# Altium PCB PCB1.pcbdoc
Units mil, origin at the board's own origin, x right, y up, seen from the top; angles counter-clockwise.
Board outline 2079.8 x 2079.8 mil, 2 copper layers (Top Layer, Bottom Layer); 9 components, 14 nets, 54 pads, 51 vias.
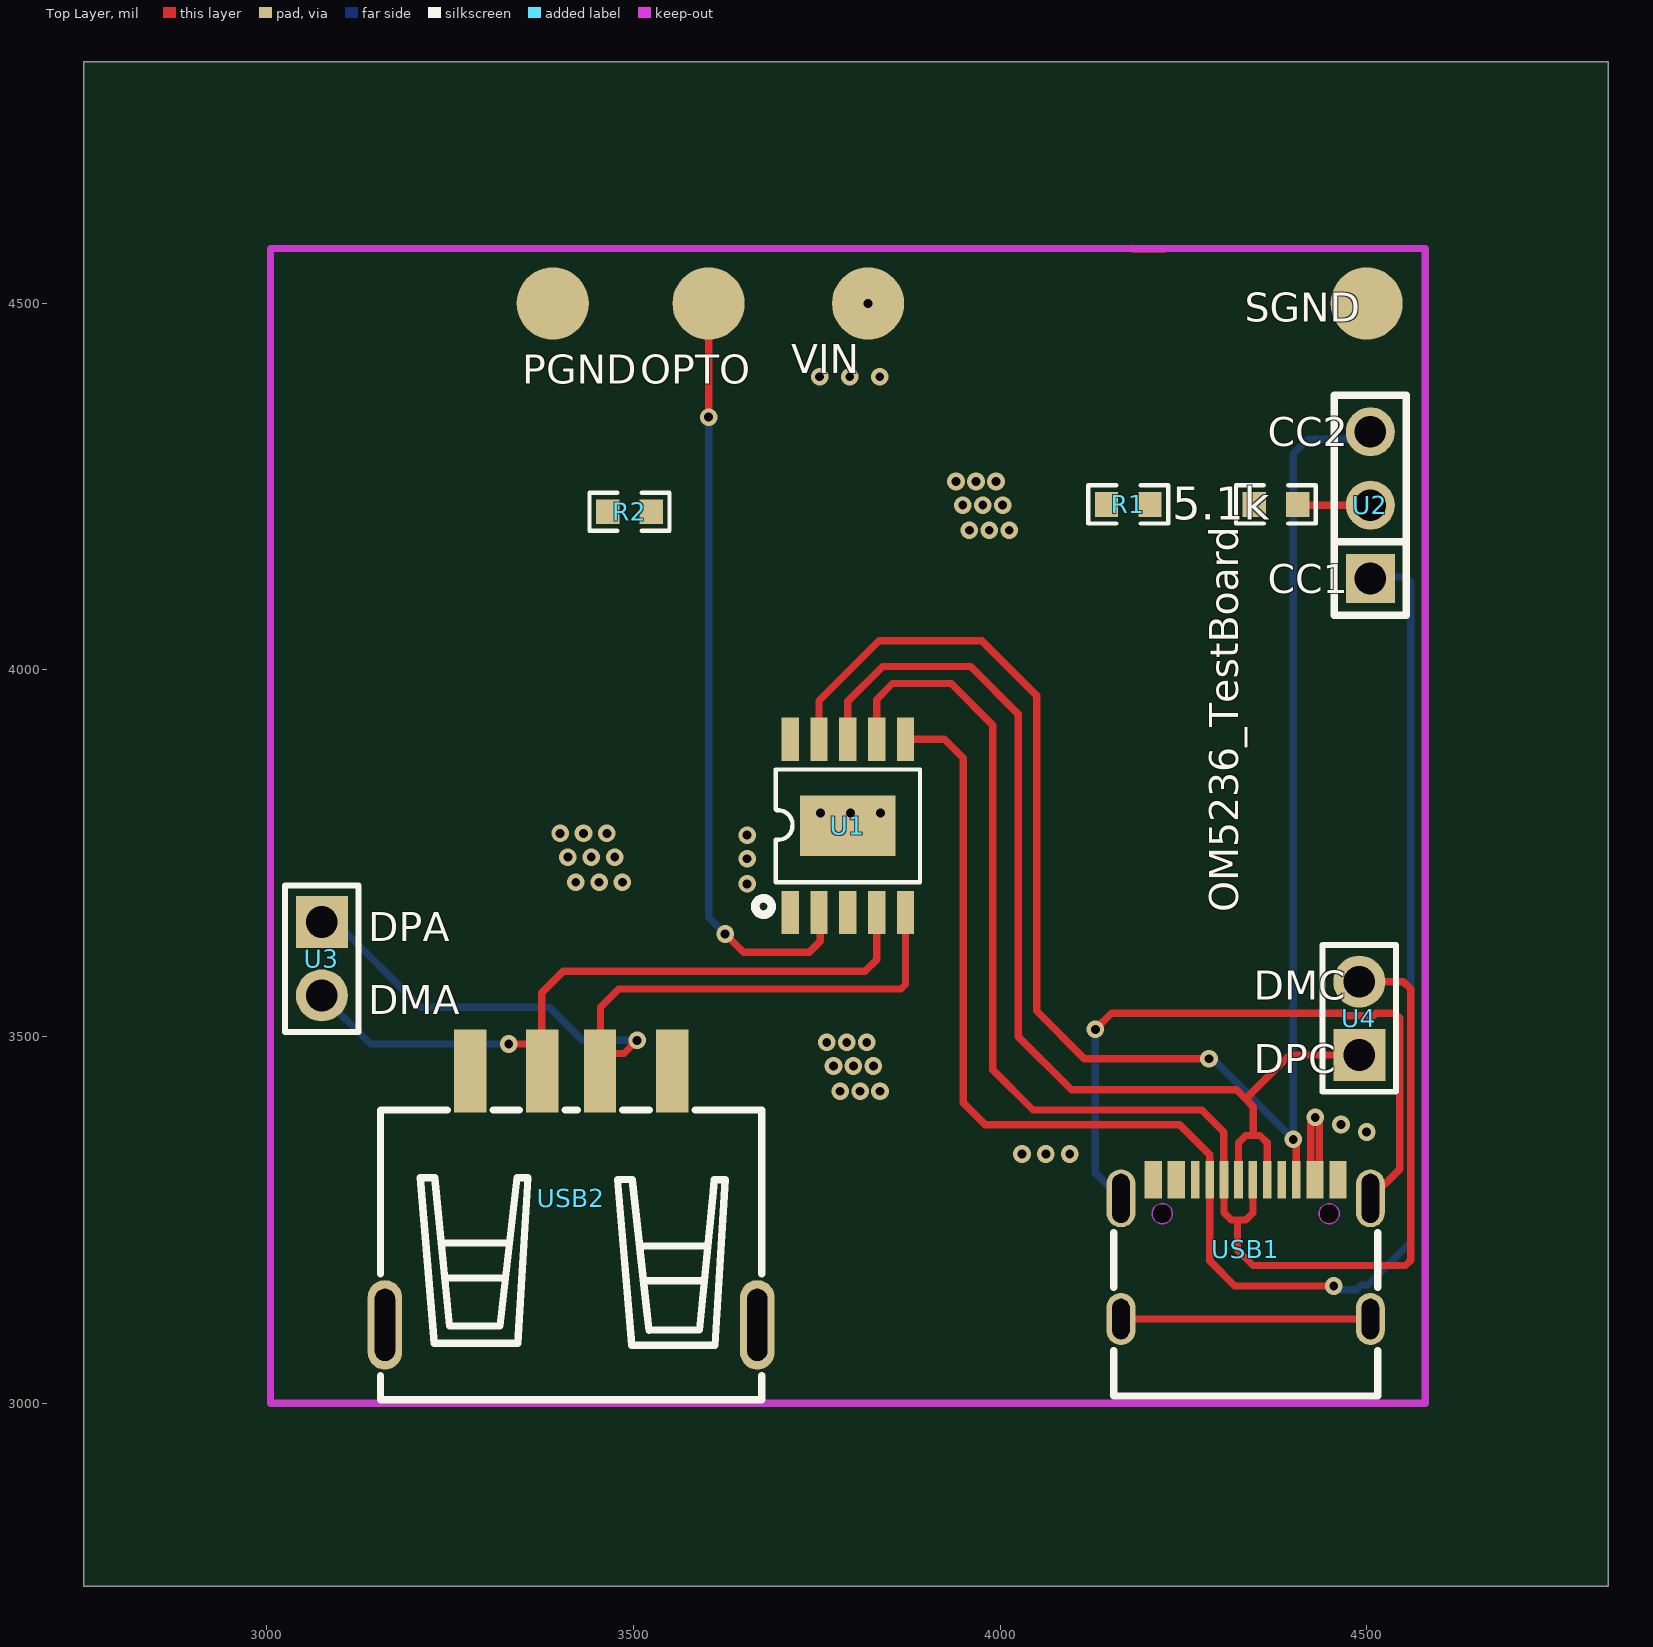
[diagram p0: Top Layer view]
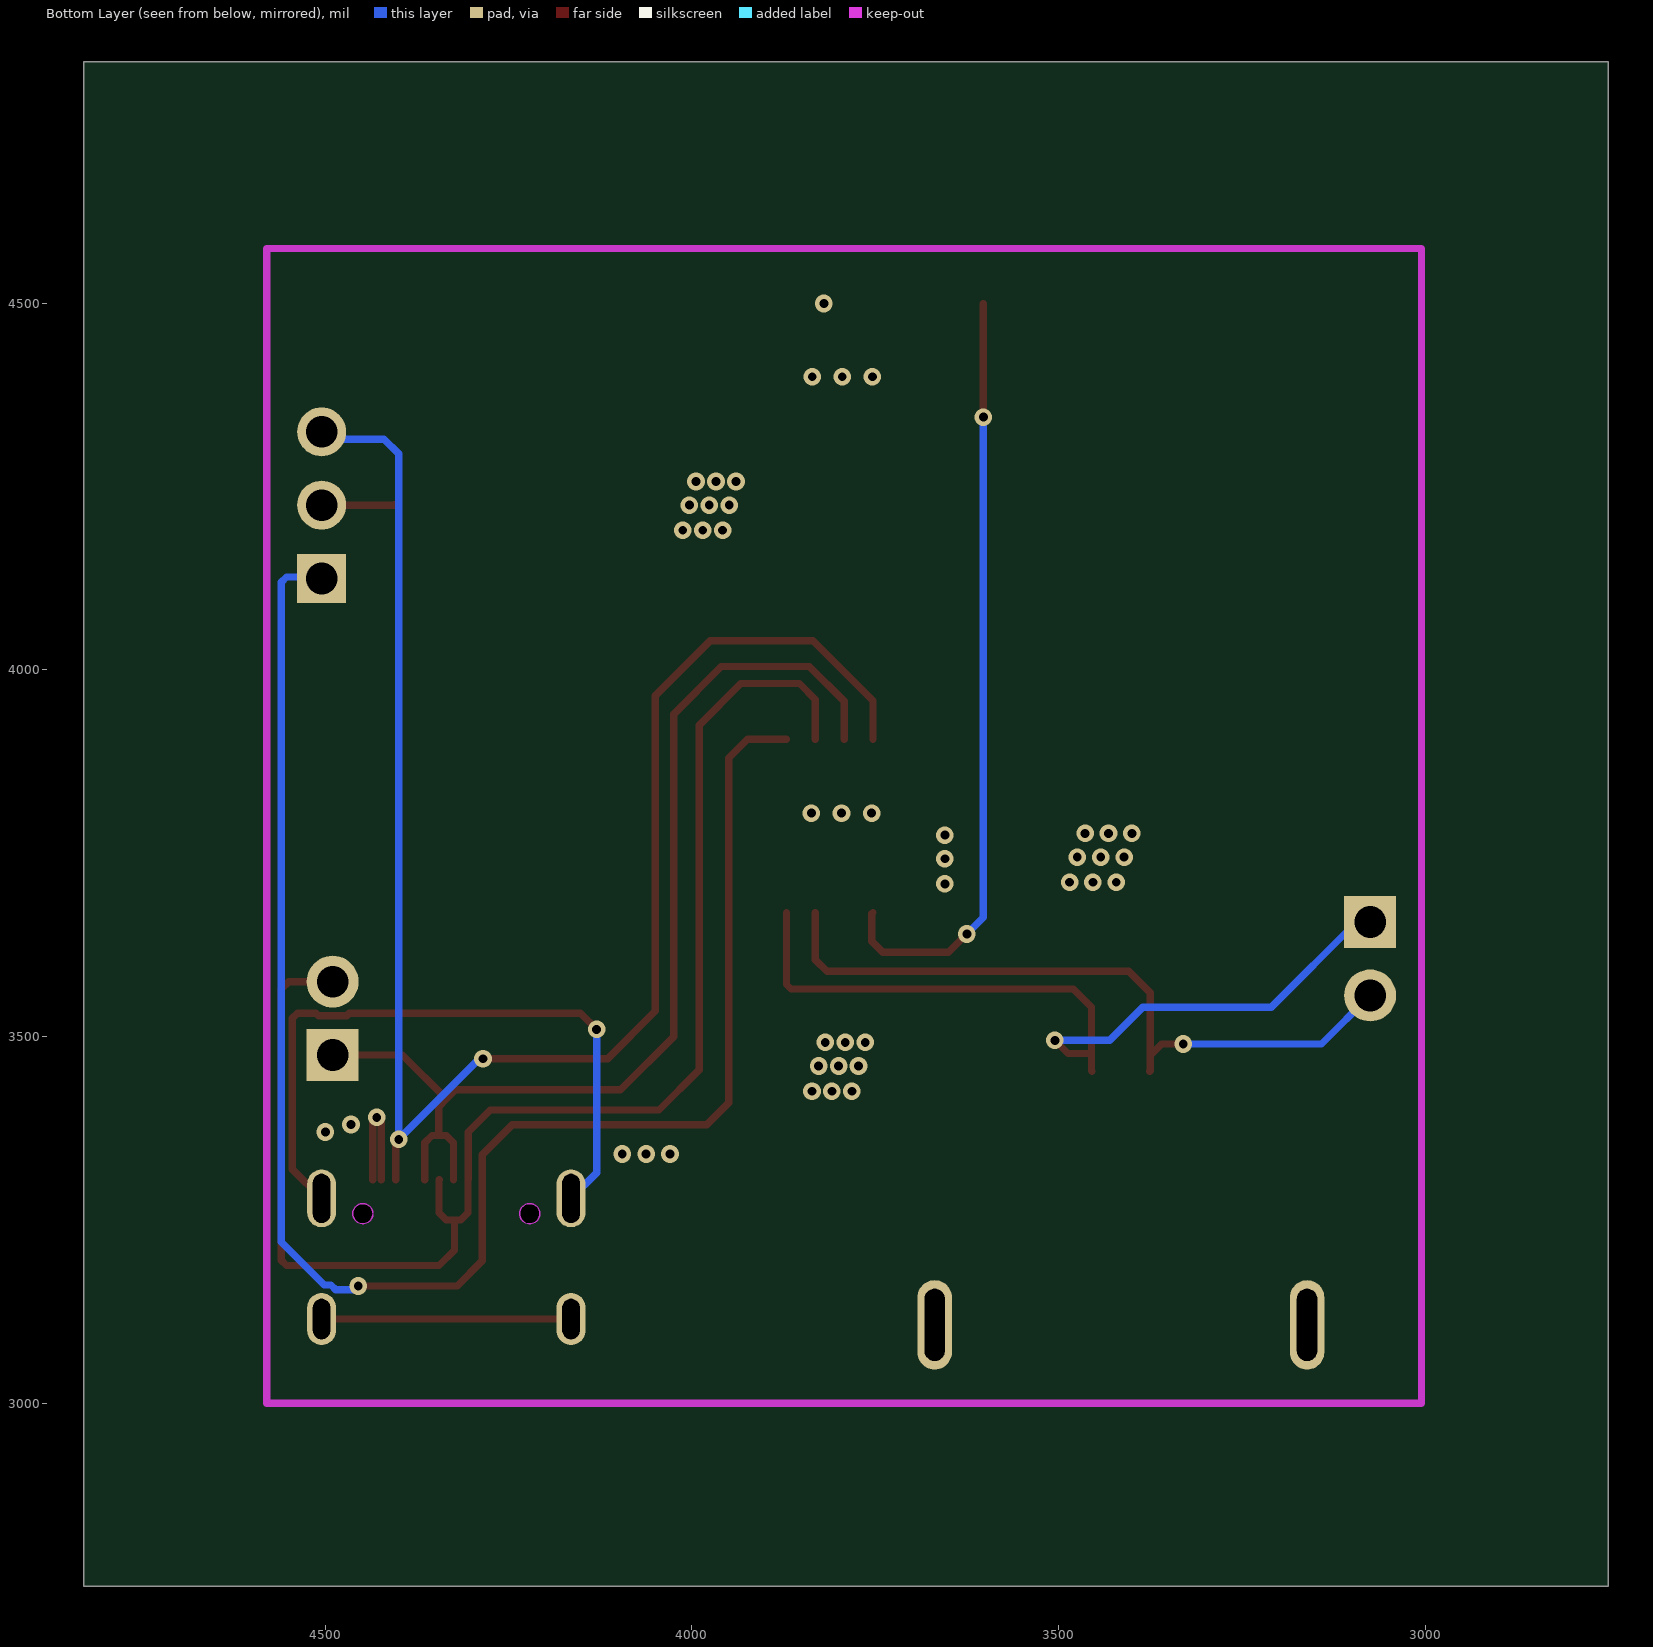
[diagram p1: Bottom Layer view, seen from below]

## Layer stack, top to bottom
Top Layer: signal copper (thickness not stored)
Dielectric: dielectric 12.6, FR-4, Dk 4.8
Bottom Layer: signal copper (thickness not stored)

## Board outline
4829.8,2750 2750,2750 2750,4829.8 4829.8,4829.8

## Design rules (kind name [scope] priority, off if disabled: settings)
BoardOutlineClearance copperThickness1oz [All] p0: genericclearance=10 ignorepadtopadclearanceinfootprint=FALSE except(0: Arc-SplitContinuation Track-SplitContinuation SMDPad-SplitContinuation THPad-SplitContinuation Via-SplitContinuation Fill-SplitContinuation Poly-SplitContinuation Region-SplitContinuation Text-SplitContinuation; 6: Track-CutoutEdge SMDPad-CutoutEdge THPad-CutoutEdge Via-CutoutEdge Region-CutoutEdge; 11.8: Track-OutlineEdge SMDPad-OutlineEdge THPad-OutlineEdge Via-OutlineEdge Fill-OutlineEdge Region-OutlineEdge Poly-OutlineEdge Text-OutlineEdge Fill-CutoutEdge)
BoardOutlineClearance copperThickness2oz [All] p0: genericclearance=10 ignorepadtopadclearanceinfootprint=FALSE except(0: Arc-SplitContinuation Track-SplitContinuation SMDPad-SplitContinuation THPad-SplitContinuation Via-SplitContinuation Fill-SplitContinuation Poly-SplitContinuation Region-SplitContinuation Text-SplitContinuation; 6: Track-CutoutEdge SMDPad-CutoutEdge THPad-CutoutEdge Via-CutoutEdge Region-CutoutEdge; 11.8: Track-OutlineEdge SMDPad-OutlineEdge THPad-OutlineEdge Via-OutlineEdge Fill-OutlineEdge Region-OutlineEdge Poly-OutlineEdge Text-OutlineEdge Fill-CutoutEdge)
Clearance copperThickness1oz [(InNet('GND') OR InNet('PGND') OR InNet('VBUSC') OR InNet('OPTP') OR InNet('DMA') OR InNet('DPA') OR InNet('CC1') OR InNet('DMC') OR InNet('DPC') OR InNet('CC2') OR InNet('VBUSA') OR InNet('VIN') OR InNet('SGND') OR InNet('$1N1508'))] p1: gap=7 ignorepadtopadclearanceinfootprint=FALSE except(4: Track-Track; 6: Track-SMDPad SMDPad-SMDPad Track-THPad SMDPad-THPad THPad-THPad Track-Via SMDPad-Via THPad-Via Via-Via SMDPad-Fill THPad-Fill Via-Fill Fill-Fill Track-Region SMDPad-Region THPad-Region Via-Region Region-Region Track-Poly SMDPad-Poly THPad-Poly Via-Poly Fill-Poly Region-Poly Poly-Poly Track-Text SMDPad-Text THPad-Text Via-Text Fill-Text Region-Text Poly-Text Text-Text; 6.9: Track-Hole SMDPad-Hole THPad-Hole Via-Hole Fill-Hole Region-Hole Poly-Hole Text-Hole Sheet-Hole; 11.8: Track-Fill Fill-Region Track-Sheet SMDPad-Sheet THPad-Sheet Via-Sheet Fill-Sheet Region-Sheet Poly-Sheet Text-Sheet)
Clearance copperThickness2oz [All] p1: gap=7 ignorepadtopadclearanceinfootprint=FALSE except(6: Track-SMDPad SMDPad-SMDPad Track-THPad SMDPad-THPad THPad-THPad Track-Via SMDPad-Via THPad-Via Via-Via SMDPad-Fill THPad-Fill Via-Fill Fill-Fill Track-Region SMDPad-Region THPad-Region Via-Region Region-Region Track-Poly SMDPad-Poly THPad-Poly Via-Poly Fill-Poly Region-Poly Poly-Poly Track-Text SMDPad-Text THPad-Text Via-Text Fill-Text Region-Text Poly-Text Text-Text; 6.9: Track-Hole SMDPad-Hole THPad-Hole Via-Hole Fill-Hole Region-Hole Poly-Hole Text-Hole Sheet-Hole; 8: Track-Track; 11.8: Track-Fill Fill-Region Track-Sheet SMDPad-Sheet THPad-Sheet Via-Sheet Fill-Sheet Region-Sheet Poly-Sheet Text-Sheet)
DiffPairsRouting differentialPair [All] p1: maxuncoupledlength=10 minlimit=6 maxlimit=6 mostfreqgap=6 toplayer_minwidth=5 toplayer_prefwidth=10 toplayer_maxwidth=100 bottomlayer_minwidth=5 bottomlayer_prefwidth=10 bottomlayer_maxwidth=100
PasteMaskExpansion pasteMaskExpansion [All] p1: expansion=0
PlaneConnect innerPlane [All] p1: planeconnectstyle=Relief reliefexpansion=20 reliefentries=4 reliefconductorwidth=10 reliefairgap=10
PolygonConnect copperRegion [All] p1: connectstyle=Direct reliefentries=4 reliefconductorwidth=10 polygonreliefangle="90 Angle" airgapwidth=10
RoutingVias viaSize [All] p1: viastyle="Through Hole" holewidth=12.0078 minholewidth=11.811 maxholewidth=248.0314 width=24.0158 minwidth=19.685 maxwidth=393.7008
SolderMaskExpansion solderMaskExpansion [All] p1: useseparateexpansions=TRUE expansion=2 expansionbottom=2
Width copperThickness1oz [All] p1: maxlimit=100 minlimit=5 preferedwidth=10
Width copperThickness2oz [All] p1: maxlimit=100 minlimit=8 preferedwidth=10

## Components (designator, comment, footprint, x,y, rotation, side; value= is the part's Value field where it differs from the comment)
5.1k "0" R0603 4376.32,4225.74 r180 top
R1 "0" R0603 4175,4225.74 r0 top
R2 "0" R0603 3494.66,4215.74 r0 top
U1 "OM5236" ESSOP-10_L4.9-W3.9-P1.00-LS6.0-BL-EP 3792.4,3787.41 r0 top
U2 "HC-PZ254-11.5L-1x3PZ" HDR-TH_3P-P2.54-V-M 4505,4224.8 r90 top
U3 "PZ2.54-1*2" HDR-TH_2P-P2.54-V-M-3 3075,3606.17 r270 top
U4 "PZ2.54-1*2" HDR-TH_2P-P2.54-V-M-3 4490,3524.8 r90 top
USB1 "KH-TYPE-C-16P" USB-C-SMD_KH-TYPE-C-16P 4335,3209.8 r0 top
USB2 "10.0 QHHTZB6.3" USB-A-TH_10.0QHHTZB6.3 3415,3279.8 r0 top

## Footprints (in the part's own frame and the unit in brackets; to place one, negate y for a bottom-side part, rotate by r counter-clockwise, add the part's x,y. Pads: shape width x height; smd on the part's side, far side on the other; paste and mask are expansions set on the pad)
ESSOP-10_L4.9-W3.9-P1.00-LS6.0-BL-EP [mm]
  rect 0.6x1.5 smd: 1(-2,-3) 2(-1,-3) 3(0,-3) 4(1,-3) 5(2,-3) 6(2,3) 7(1,3) 8(0,3) 9(-1,3) 10(-2,3)
  rect 3.3x2.1 smd: 11(0,0)
  silkscreen extent -3.2,-3.08 2.5,1.95
HDR-TH_2P-P2.54-V-M-3 [mm]
  rect 1.8x1.8 hole 1.1: 1(-1.27,0)
  round 1.8 hole 1.1: 2(1.27,0)
  silkscreen extent -2.54,-1.27 2.54,1.27
HDR-TH_3P-P2.54-V-M [mm]
  rect 1.7x1.7 hole 1.1: 1(-2.54,0)
  round 1.7 hole 1.1: 2(0,0) 3(2.54,0)
  silkscreen extent -3.81,-1.25 3.81,1.25
R0603 [mil]
  rect 31.75x34.02 smd: 1(-29.66,0) 2(29.66,0)
  silkscreen extent -55,-26 55,26
USB-A-TH_10.0QHHTZB6.3 [mm]
  rect 1.12x2.88 smd: 1(-3.5,4.395) 2(-1,4.395) 3(1,4.395) 4(3.5,4.395)
  oval 1.2x3.1 hole 0.7 slot 2.5 at 90 deg: 5(-6.45,-4.395) 6(6.45,-4.395)
  silkscreen extent -6.6,-6.98 6.6,3.05
USB-C-SMD_KH-TYPE-C-16P [mm]
  oval 1x2 hole 0.6 slot 1.7 at 90 deg: 1(-4.32,1.765) 2(4.32,1.765)
  oval 1x1.8 hole 0.6 slot 1.4 at 90 deg: 3(-4.32,-2.415) 4(4.32,-2.415)
  rect 0.3x1.3 smd: A1(-3.35,2.415) A4(-2.55,2.415) A5(-1.25,2.415) A6(-0.25,2.415) A7(0.25,2.415) A8(1.25,2.415) A9(2.55,2.415) A12(3.35,2.415) B1(3.05,2.415) B4(2.25,2.415) B5(1.75,2.415) B6(0.75,2.415) B7(-0.75,2.415) B8(-1.75,2.415) B9(-2.25,2.415) B12(-3.05,2.415)
  Board Outline Layer circle w0.005: c-2.89,1.235 r0.35
  Board Outline Layer circle w0.005: c2.89,1.235 r0.35
  Board Outline Layer region: -2.54,1.235 -2.575,1.083 -2.672,0.961 -2.812,0.894 -2.968,0.894 -3.108,0.961 -3.205,1.083 -3.24,1.235 -3.24,1.235 -3.205,1.387 -3.108,1.509 -2.968,1.576 -2.812,1.576 -2.672,1.509 -2.575,1.387 -2.54,1.235
  Board Outline Layer region: 3.24,1.235 3.205,1.083 3.108,0.961 2.968,0.894 2.812,0.894 2.672,0.961 2.575,1.083 2.54,1.235 2.54,1.235 2.575,1.387 2.672,1.509 2.812,1.576 2.968,1.576 3.108,1.509 3.205,1.387 3.24,1.235
  Multi-Layer board cut-out: -2.54,1.235 -2.575,1.083 -2.672,0.961 -2.812,0.894 -2.968,0.894 -3.108,0.961 -3.205,1.083 -3.24,1.235 -3.24,1.235 -3.205,1.387 -3.108,1.509 -2.968,1.576 -2.812,1.576 -2.672,1.509 -2.575,1.387 -2.54,1.235
  Multi-Layer board cut-out: 3.24,1.235 3.205,1.083 3.108,0.961 2.968,0.894 2.812,0.894 2.672,0.961 2.575,1.083 2.54,1.235 2.54,1.235 2.575,1.387 2.672,1.509 2.812,1.576 2.968,1.576 3.108,1.509 3.205,1.387 3.24,1.235
  silkscreen extent -4.57,-5.08 4.57,0.57

## Free pads (board coordinates)
  round 98.43 smd: 1(3390,4499.8) 1(3602.5,4499.8) 1(3820,4499.8) 1(4500,4499.8)

## Via types
v1: diameter 24.02, hole 12.01, Top Layer to Bottom Layer, 51 vias

## Nets (pads, with @x,y where several pads share a name; then routed paths per layer and width w, separated by ;. In a path a pad name is that pad's centre, name@x,y a point inside that pad or via, vN(x,y) a via of type N, cw(c..) or ccw(c..) an arc to the next point about the centre after c; other vN are vias at no path point)
$1N1508: 5.1k.1 U2.2 | length 99.4
  Top Layer w10: 5.1k.1 4406.91,4224.8 U2.2
CC1: U1.6 U2.1 USB1.A5 | length 2345.8
  Top Layer w10: U1.6 3924.29,3905.51 3950,3879.8 3950,3409.8 3980,3379.8 4245,3379.8 4285.79,3339.01 USB1.A5 4285.79,3194.01 4320,3159.8 v1(4455,3159.8)
  Bottom Layer w10: v1(4455,3159.8) 4460,3154.8 4486.04,3154.8 4492.38,3161.14 4501.34,3161.14 4560,3219.8 4560,4119.8 4552.93,4126.87 4512.07,4126.87 4510,4124.8 U2.1
CC2: U1.9 U2.3 USB1.B5 | length 2375.8
  Top Layer w10: U1.9 3753.03,3957.83 3835,4039.8 3975,4039.8 4050,3964.8 4050,3534.8 4115,3469.8 v1(4285,3469.8) ; v1(4400,3359.8) 4403.9,3355.9 USB1.B5
  Bottom Layer w10: v1(4285,3469.8) 4290,3469.8 v1(4400,3359.8) 4400,4294.8 4420,4314.8 4495,4314.8 U2.3
DMA: U1.4 U3.2 USB2.2 | length 981.1
  Top Layer w10: v1(3330,3489.8) 3359.28,3489.8 USB2.2@3375,3474.08 ; USB2.2 3375,3453.46 USB2.2@3375,3474.08 ; U1.4 3831.77,3604.8 3815.89,3588.92 3404.11,3588.92 3375,3559.8 USB2.2@3375,3474.08
  Bottom Layer w10: U3.2 3141.36,3489.8 v1(3330,3489.8)
DMC: U1.7 U4.2 USB1.A7 USB1.B7 | length 1996.1
  Top Layer w10: U1.7 3831.77,3959.8 3853.39,3981.42 3933.39,3981.42 3990,3924.8 3990,3454.8 4045,3399.8 4275,3399.8 4305,3369.8 4305,3305.35 USB1.B7 4305.47,3259.8 4315.47,3249.8 4335,3249.8 4345,3259.8 4345,3304.72 USB1.A7 ; 4323.96,3244.8 4323.96,3208.77 4345,3187.73 4552.93,3187.73 4560,3194.8 4560,3564.8 4550,3574.8 U4.2
DPA: U1.5 U3.1 USB2.3 | length 1168.8
  Top Layer w10: USB2.3 3455,3453.46 USB2.3@3455,3476.96 ; v1(3505,3494.8) 3487.16,3476.96 USB2.3@3455,3476.96 ; U1.5 3871.14,3570.94 3865,3564.8 3480,3564.8 3455,3539.8 USB2.3@3455,3476.96
  Bottom Layer w10: U3.1 3093.64,3656.17 3210,3539.8 3385,3539.8 3430,3494.8 v1(3505,3494.8)
DPC: U1.8 U4.1 USB1.A6 USB1.B6 | length 1498.6
  Top Layer w10: U1.8 3792.4,3957.2 3840,4004.8 3960,4004.8 4025,3939.8 4025,3499.8 4097.5,3427.3 4322.5,3427.3 4334.02,3415.78 ; USB1.A6 4325.16,3355.17 4335,3365.01 4345.34,3365.01 ; USB1.B6 4364.53,3355.01 4354.53,3365.01 4345.34,3365.01 ; U4.1 4395,3474.8 4335.98,3415.78 4334.02,3415.78 ; 4334.02,3415.78 4345.34,3404.46 4345.34,3365.01
GND: R1.1 R2.2 U1.3
  other v1: 3781.86,3425.47 3809.07,3425.47 3836.29,3425.47 3772.78,3459.8 3800,3459.8 3827.22,3459.8 3763.71,3492.02 3790.93,3492.02 3818.14,3492.02 3421.25,3710.47 3453.12,3710.47 3485,3710.47 3410.62,3744.8 3442.5,3744.8 3474.38,3744.8 3400,3777.02 3431.88,3777.02 3463.75,3777.02 3958.14,4190.47 3985.36,4190.47 4012.58,4190.47 3949.07,4224.8 3976.29,4224.8 4003.5,4224.8 3940,4257.02 3967.22,4257.02 3994.43,4257.02
OPTP: pad.1@3602.5,4499.8 U1.2 | length 1056.2
  Top Layer w10: v1(3602.5,4344.8) pad.1@3602.5,4499.8 ; v1(3625,3639.8) 3650,3614.8 3740,3614.8 3755,3629.8 3755,3667.32 U1.2
  Bottom Layer w10: v1(3602.5,4344.8) 3602.5,3662.3 v1(3625,3639.8)
PGND: pad.1@3390,4499.8 R2.1 USB1.1 USB1.2 USB1.3 USB1.4 USB1.A1 USB1.A12 USB1.B1 USB1.B12 USB2.4 USB2.5 USB2.6 | length 1277.1
  Top Layer w10: v1(4130,3509.8) 4152.07,3531.87 4467.28,3531.87 4470.77,3528.39 4509.23,3528.39 4512.72,3531.87 4537.93,3531.87 4545,3524.8 4545,3319.21 USB1.2 ; USB1.3 USB1.4
  Bottom Layer w10: v1(4130,3509.8) 4130,3314.21 USB1.1
SGND: 5.1k.2 pad.1@4500,4499.8 R1.2
VBUSA: U1.10 USB2.1
VBUSC: U1.1 USB1.A4 USB1.A9 USB1.B4 USB1.B9 | length 174.7
  Top Layer w10: USB1.B4 4423.58,3383.38 v1(4430,3389.8) 4435.39,3384.41 USB1.A9
  other v1: 4030,3339.8 4062.5,3339.8 4095,3339.8 4500,3369.8 4465,3380.09 3655,3708.25 3655,3742.59 3655,3774.8
VIN: pad.1@3820,4499.8 U1.11
  other v1: 3755,3804.8 3796.04,3804.8 3837.07,3804.8 3753.96,4399.8 3795,4399.8 3836.04,4399.8 3820,4499.8
pads on no net: USB1.A8 USB1.B8

## Polygon pours and split planes (outlines as drawn)
VIN on Bottom Layer (solid, remove dead copper, pour order 22): 3693.97,4574.8 3892.06,4574.8 3892.06,3710.63 3693.97,3710.63
VBUSC on Top Layer (solid, remove dead copper, pour order 14): 4415,3414.8 4520,3414.8 4520,3344.8 4415,3344.8
VIN on Top Layer (solid, remove dead copper, pour order 18): 3700,4559.8 3885,4559.8 3885,4369.8 3700,4369.8
GND on Top Layer (solid, remove dead copper, pour order 20): 3005,4574.8 4579.8,4574.8 4579.8,3000 3005,3000
GND on Bottom Layer (solid, remove dead copper, pour order 28): 3005,4574.8 4579.8,4574.8 4579.8,3000 3005,3000
VBUSC on Top Layer (solid, remove dead copper, pour order 0): 3730,3629.8 3660,3629.8 3625,3664.8 3625,3784.8 3640,3799.8 3684.74,3799.8 3684.74,3700.52 3730,3700.52
VBUSC on Top Layer (solid, remove dead copper, pour order 2): 4225,3274.8 4255,3274.8 4255,3344.43 4230,3369.43 4230,3369.8 4000,3369.8 3990,3359.8 3990,3341.82 4022.02,3309.8 4084.03,3309.8 4185,3339.8 4223.2,3339.8 4225,3338.01
VBUSC on Bottom Layer (solid, remove dead copper, pour order 24): 3630,3793.8 3630,3312.11 4142.69,3312.11 4142.69,3361.75 3675,3361.75 3675,3791.8 3673,3793.8
VBUSC on Bottom Layer (solid, remove dead copper, pour order 26): 4420,3409.8 4514.07,3409.8 4514.07,3350.73 4515,3349.8 4480,3349.8 4475,3344.8 4475,3179.8 3975,3179.8 3970,3184.8 3970,3361.75 4368.06,3361.75 4370,3359.8 4370,3327.49 4372.33,3329.83 4420,3329.83
VBUSA on Top Layer (solid, remove dead copper, pour order 4): 3245,3384.8 3310,3384.8 3310,3873.43 3730,3873.43 3730,3941.9 3257.1,3941.9 3245,3929.8
SGND on Top Layer (solid, remove dead copper, pour order 6): 4527.13,4574.8 4579.8,4574.8 4579.8,4522.13
SGND on Top Layer (solid, remove dead copper, pour order 8): 4185,4574.8 4180,4569.8 4225,4569.8 4230,4574.8
SGND on Top Layer (solid, remove dead copper, pour order 10): 4340,4574.8 4579.8,4574.8 4579.8,3479.8 4180,3479.8 4180,4569.8 4335,4569.8
SGND on Top Layer (solid, remove dead copper, pour order 12): 4180,4579.8 4180,4574.8 4185,4574.8
PGND on Top Layer (solid, remove dead copper, pour order 16): 3487.1,4574.8 3487.1,3949.8 3240,3949.8 3240,3379.8 3230,3369.8 3515,3369.8 3515,3504.8 3540,3529.8 3590,3529.8 3600,3519.8 3600,3369.8 3920,3369.8 4005,3284.8 4100.76,3284.8 4145.84,3329.88 4579.8,3329.88 4579.8,3000 3004.8,3000 3000,3004.8 3000,4569.8 3005,4574.8

## Keep-outs
Board Outline Layer:
  lines w10: 3005,3000 4579.8,3000 4579.8,4574.8 3005,4574.8 3005,3000

## Silkscreen, mask and mechanical layers (free items; w line width, h text height)
Top Silkscreen Layer:
  text "SGND" at 4334.05,4475.12 h39.37
  text "VIN" at 3715,4404.8 h39.37
  text "PGND" at 3348.6,4390.12 h39.37
  text "OPTO" at 3509.05,4390.12 h39.37
  text "CC2" at 4365,4304.8 h39.37
  text "CC1" at 4365,4104.8 h39.37
  text "OM5236_TestBoard" at 4325,3669.8 h39.37 r90
  text "DPA" at 3138.6,3630.12 h39.37
  text "DMC" at 4345.75,3550.12 h39.37
  text "DMA" at 3138.6,3530.12 h39.37
  text "DPC" at 4345.75,3450.12 h39.37